# Altium PCB Motherboard.PcbDoc
Units mm, origin at the board's own origin, x right, y up, seen from the top; angles counter-clockwise.
Board outline 55 x 75 mm, 4 copper layers (Top Layer, GND, 3V, Bottom Layer), stack 0.603 mm thick; 94 components, 92 nets, 318 pads, 0 vias.
Unrouted connection lines stored in the file: 177.
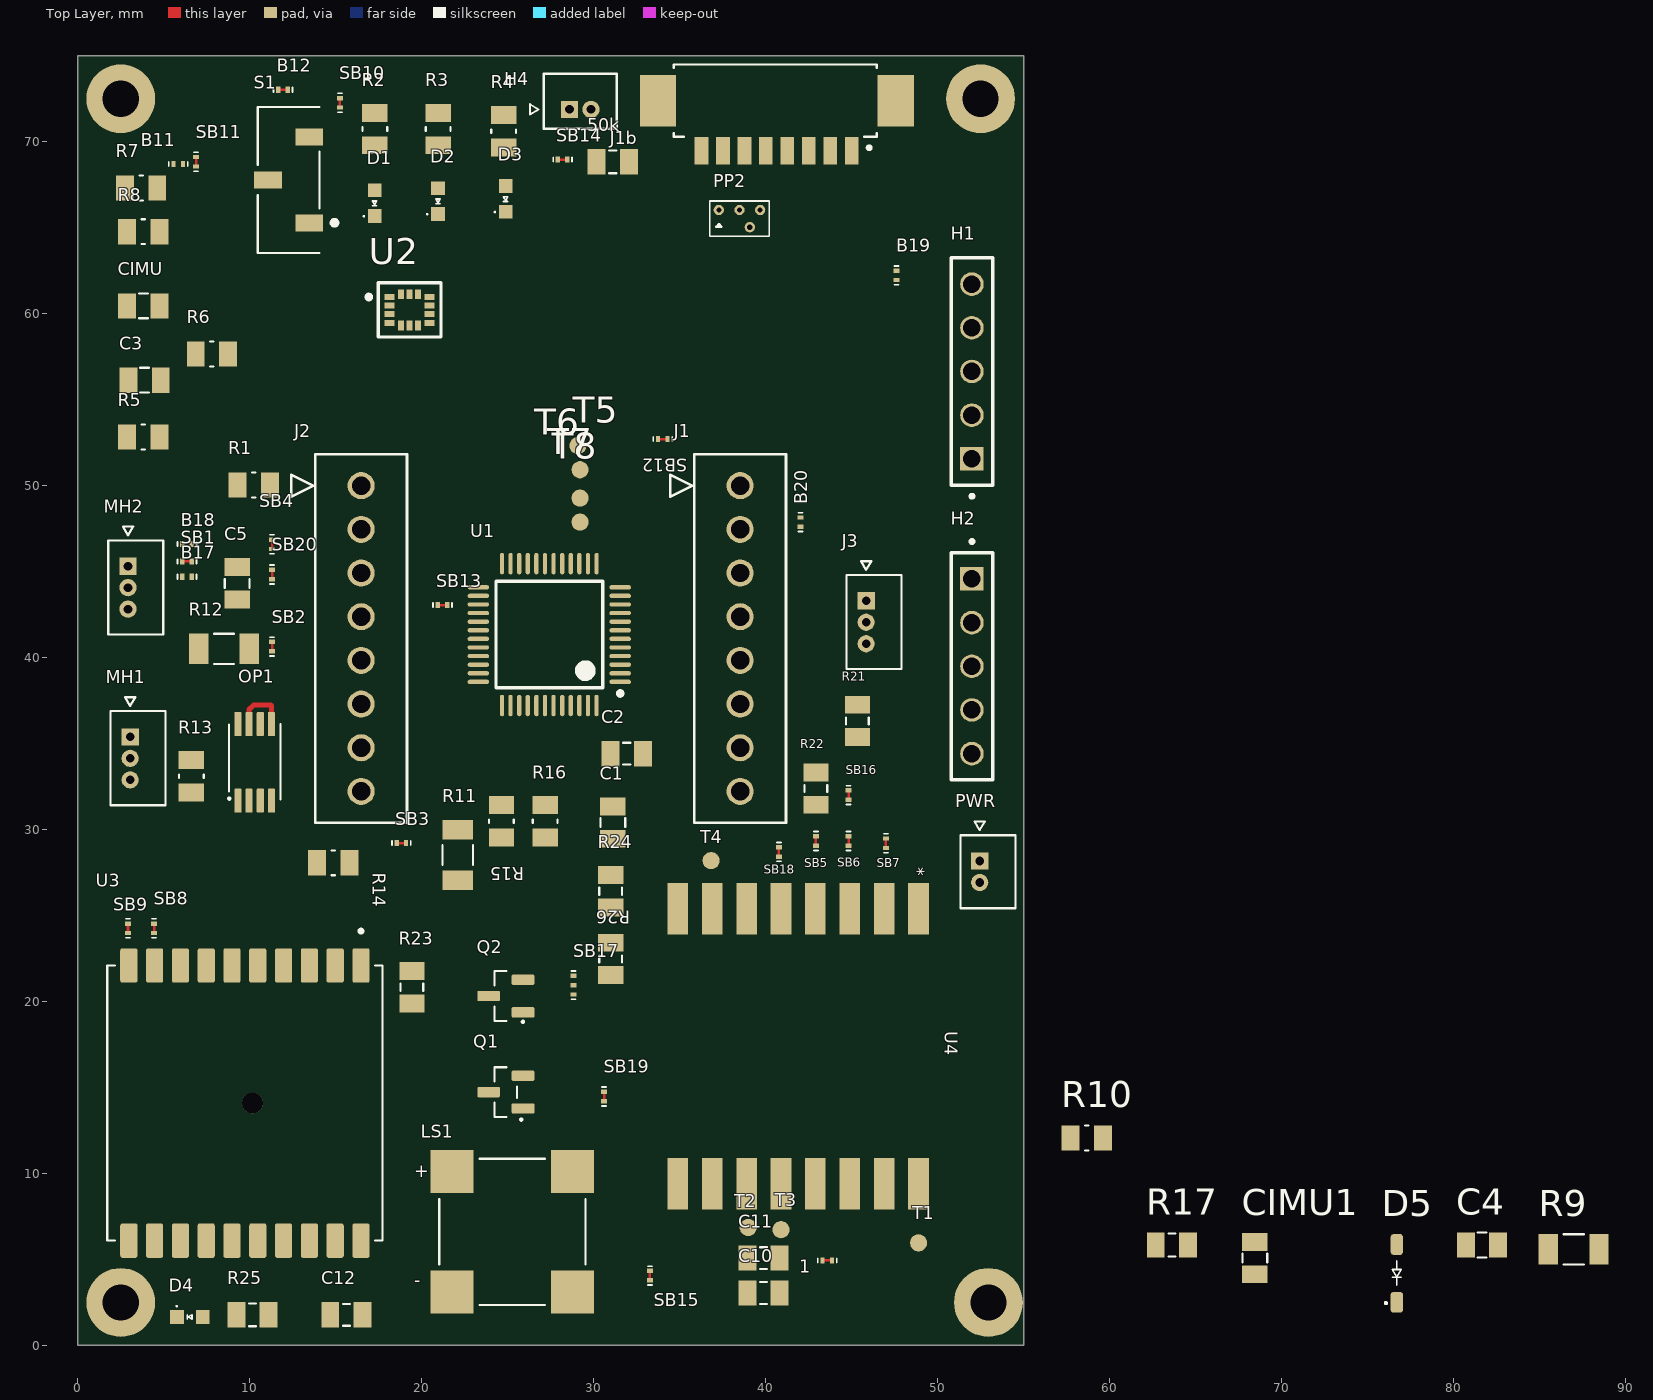
[diagram p0: Top Layer view]
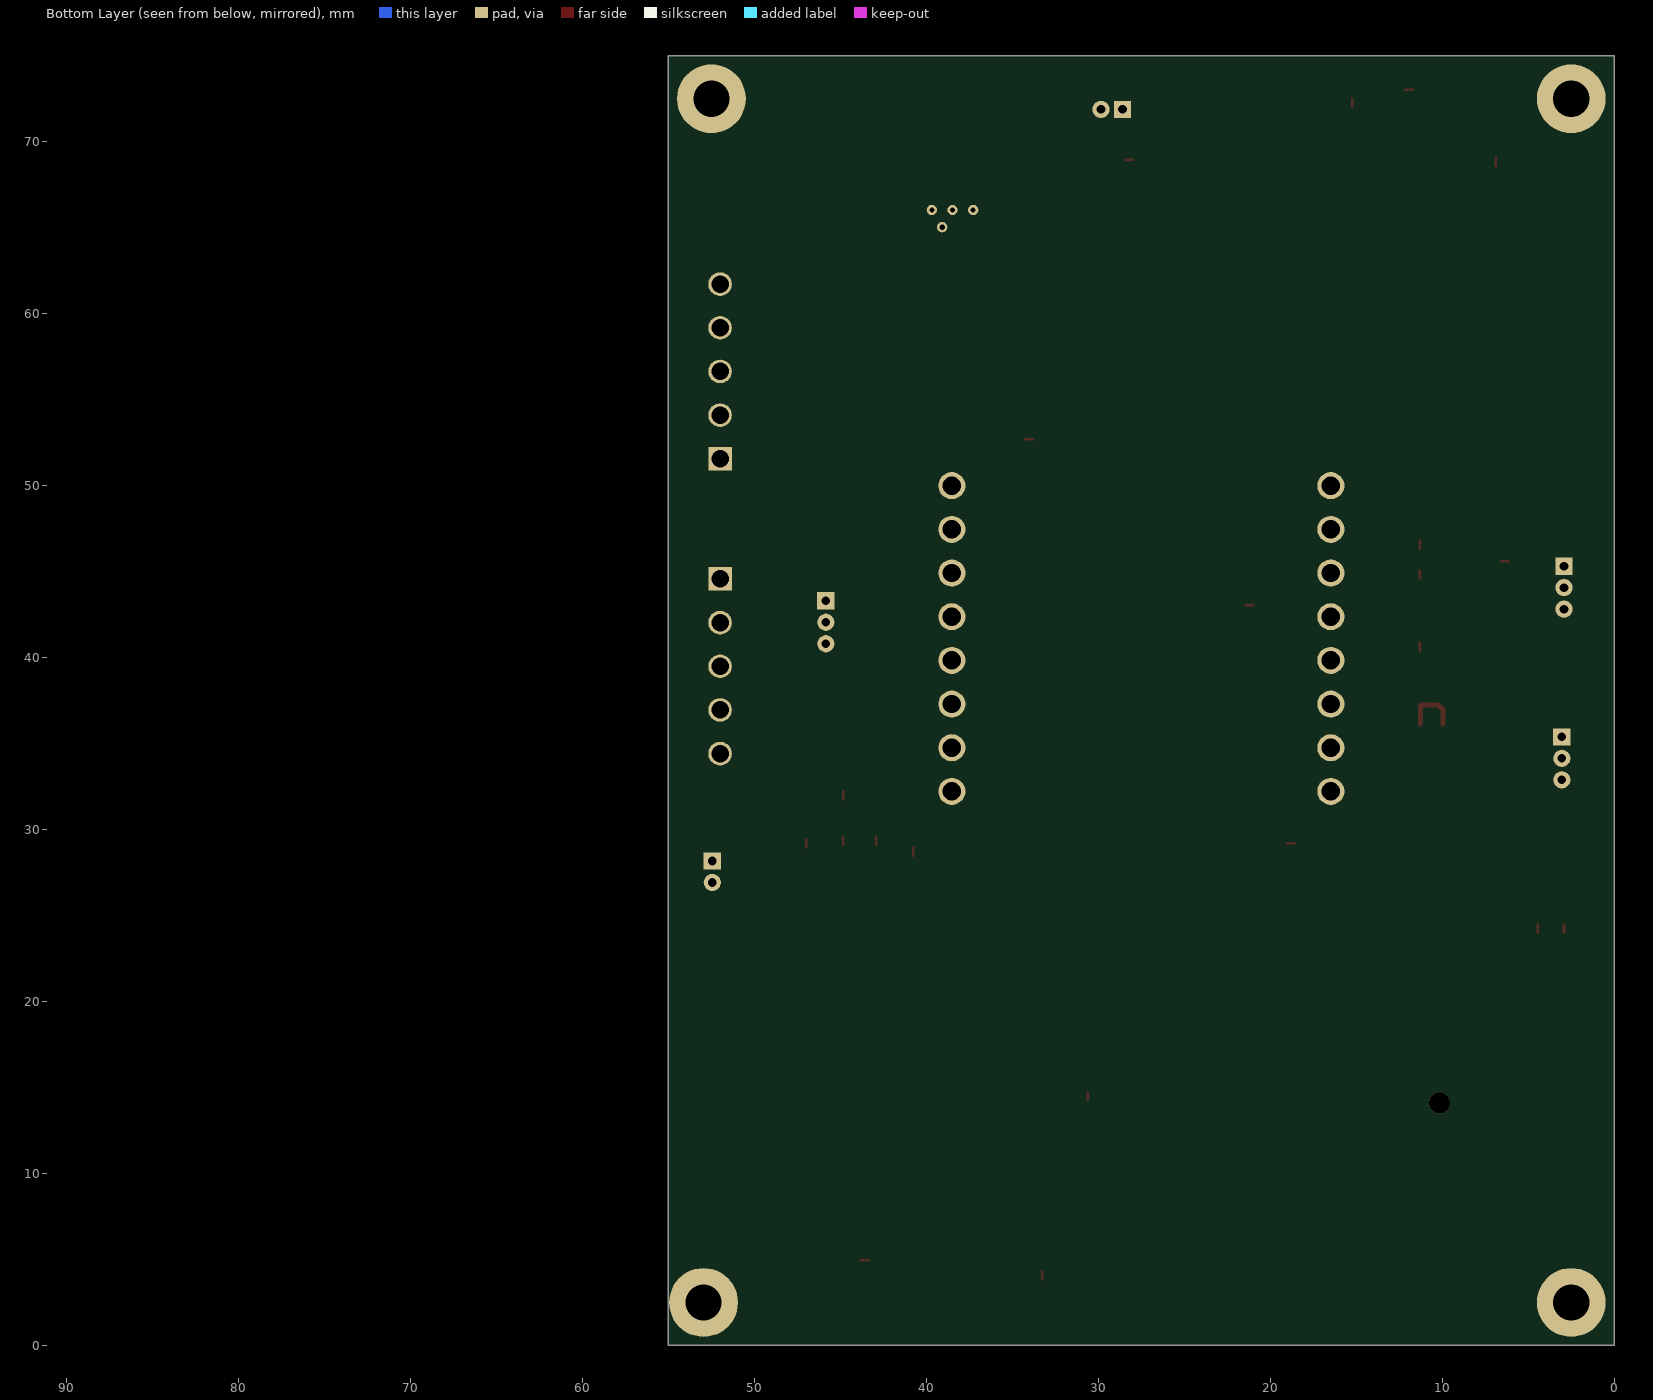
[diagram p1: Bottom Layer view, seen from below]
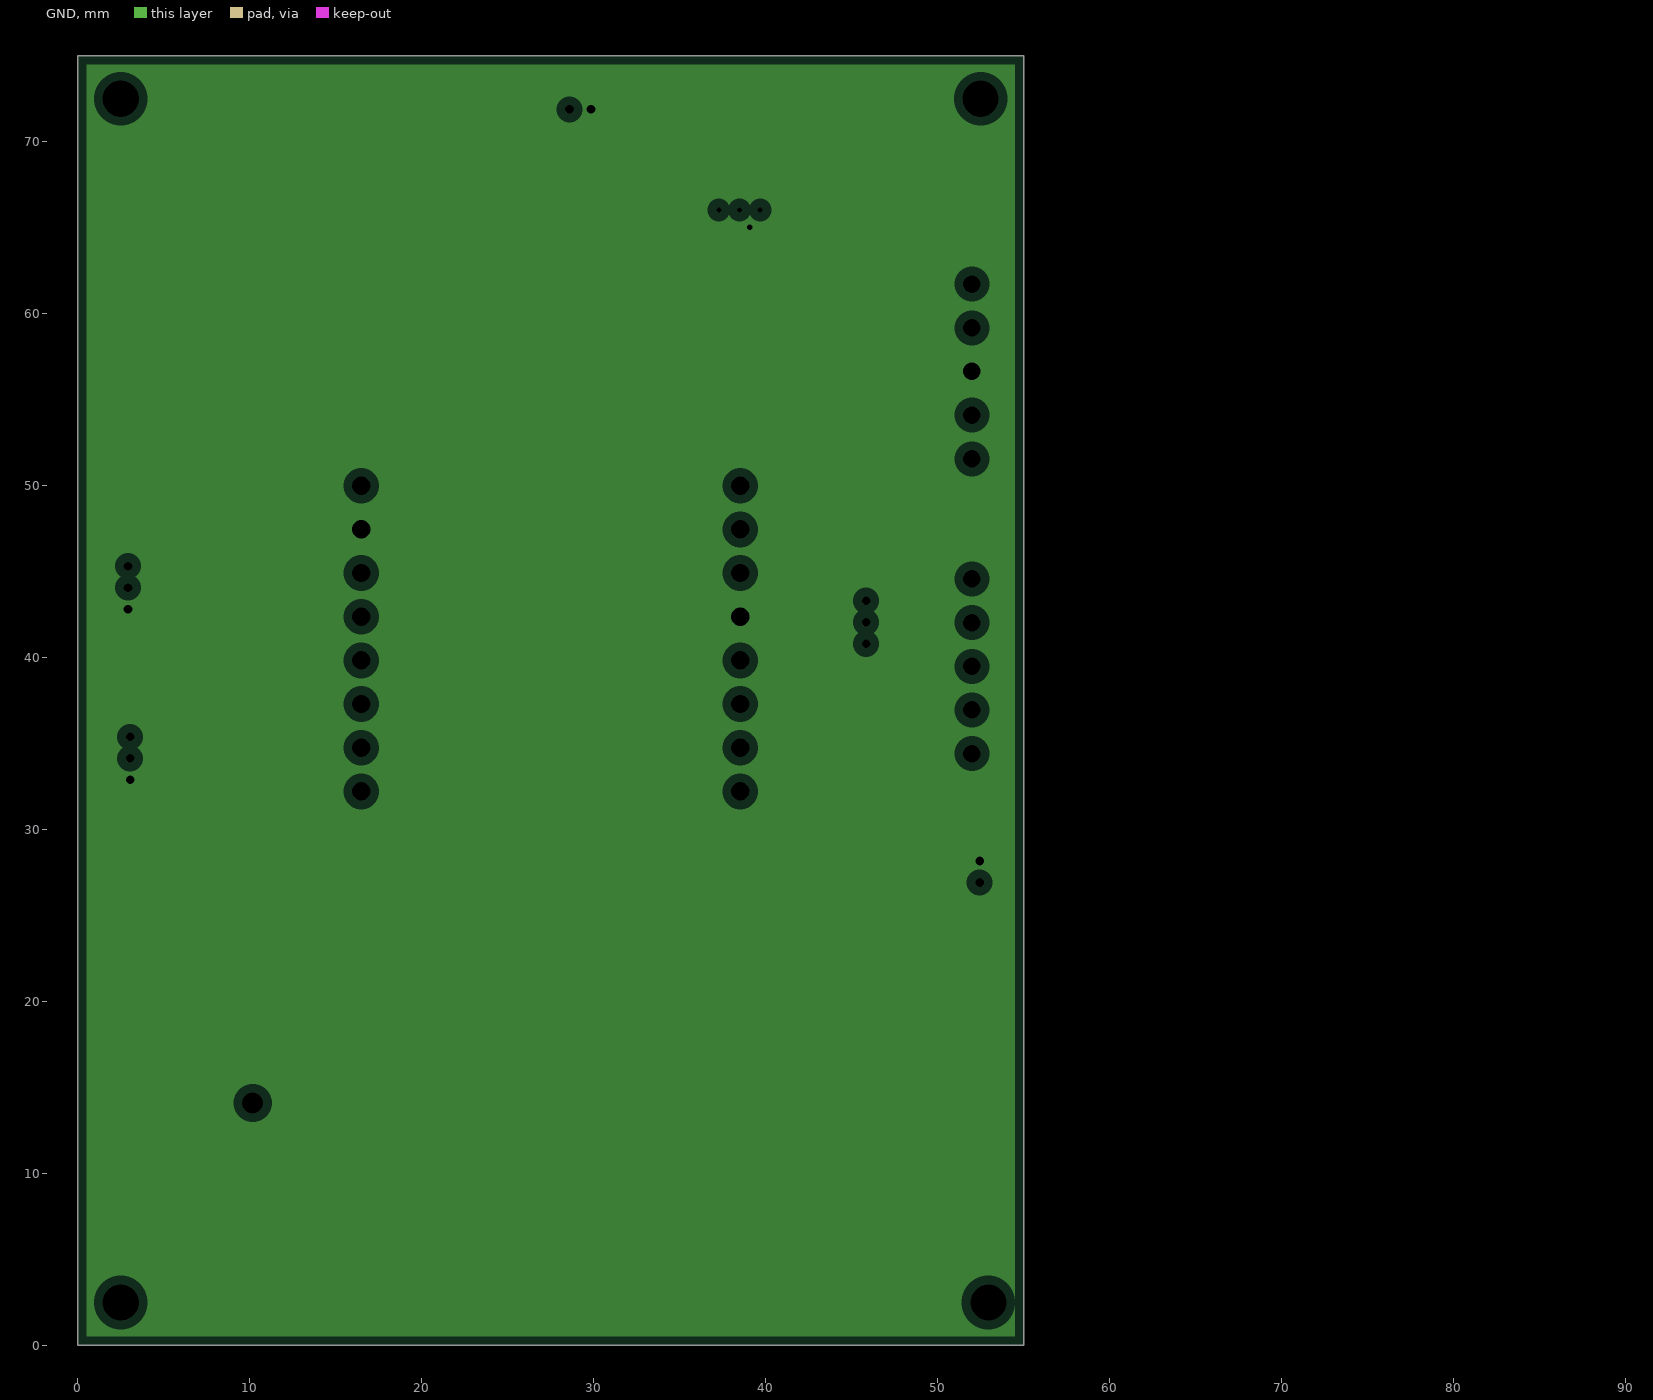
[diagram p2: GND, clearances drawn from the general rule]
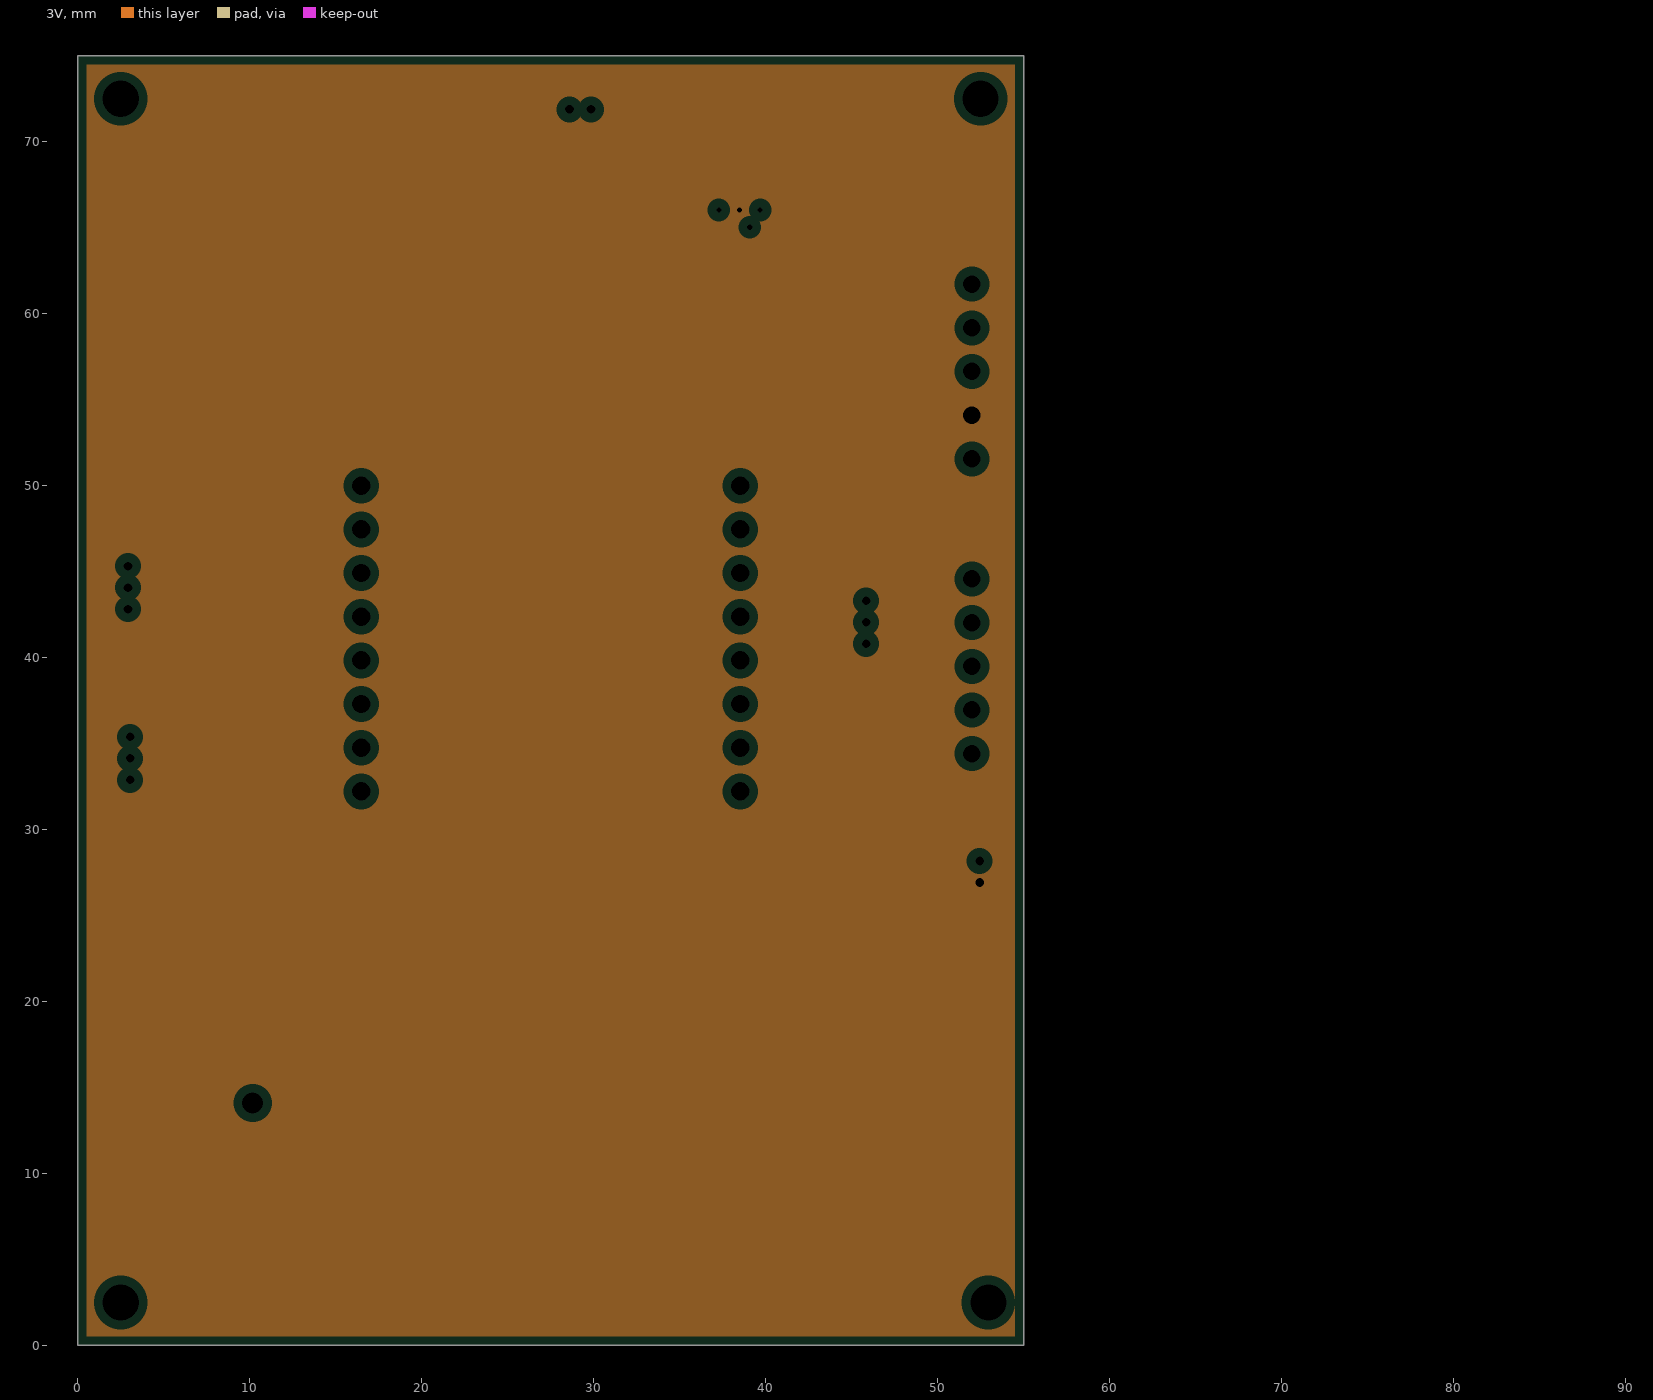
[diagram p3: 3V, clearances drawn from the general rule]

## Layer stack, top to bottom
Top Solder: solder mask 0.0102, Solder Resist, Dk 3.5
Top Layer: signal copper 0.0356
Dielectric 2: prepreg 0.0711, PP-006, Dk 4.1
GND: plane copper 0.035, net GND
Dielectric 1: dielectric 0.32, FR-4, Dk 4.8
3V: plane copper 0.035, net 3V3
Dielectric 3: prepreg 0.0711, PP-006, Dk 4.1
Bottom Layer: signal copper 0.0356
Bottom Solder: solder mask 0.0102, Solder Resist, Dk 3.5

## Board outline
0,0 55,0 55,75 0,75

## Design rules (kind name [scope] priority, off if disabled: settings)
Clearance [All] p1: gap=0.152 ignorepadtopadclearanceinfootprint=FALSE except(0: Arc-Hole Track-Hole SMDPad-Hole THPad-Hole Via-Hole Fill-Hole Poly-Hole Region-Hole Text-Hole)
HoleSize [All] p1: absolutevalues=TRUE maxlimit=6.2 minlimit=0.3 maxpercent=80.000 minpercent=20.000
MinimumAnnularRing [All] p1: minimumring=0.15
MinimumSolderMaskSliver [All] p1: minsoldermaskwidth=0.1
PlaneClearance [All] p1: clearance=0.508
PlaneConnect [All] p1: planeconnectstyle=Relief reliefexpansion=0.508 reliefentries=4 reliefconductorwidth=0.254 reliefairgap=0.254
PolygonConnect ViaConnect [IsVia] p1: connectstyle=Direct reliefconductorwidth=0.254 reliefentries=4 polygonreliefangle="90 Angle" airgapwidth=0.254
PolygonConnect [All] p2: connectstyle=Relief reliefconductorwidth=0.254 reliefentries=4 polygonreliefangle="90 Angle" airgapwidth=0.254
RoutingVias [All] p1: holewidth=0.3 width=0.6 viastyle="Through Hole" minholewidth=0.3 minwidth=0.5 maxholewidth=1 maxwidth=5
SilkToSilkClearance [All] p1: silktosilkclearance=0.1
SilkToSolderMaskClearance [IsPad] p1: minsilkscreentomaskgap=0.1 clearancetoexposedcopper=TRUE
SolderMaskExpansion [All] p1: expansion=0.051 istentingtop=FALSE
SupplyNets "Schematic Supply Nets_5" [InNet('3V3')] p1: voltage=0.000
SupplyNets "Schematic Supply Nets_4" [InNet('Vbat')] p2: voltage=0.000
SupplyNets "Schematic Supply Nets_3" [InNet('5V')] p3: voltage=0.000
SupplyNets "Schematic Supply Nets_2" [InNet('GND')] p4: voltage=0.000
SupplyNets "Schematic Supply Nets_1" [InNet('1V8')] p5: voltage=0.000
SupplyNets "Schematic Supply Nets" [InNet('GPS_3V3')] p6: voltage=0.000
Width [All] p1: maxlimit=25.4 minlimit=0.15 preferedwidth=0.3
24 further rules are at their usual default settings.

## Components (designator, comment, footprint, x,y, rotation, side; value= is the part's Value field where it differs from the comment)
1 "Solder Jumper Normally Closed 0201" "Solder Bridge Closed 0201"#1 43.582,4.953 r0 top net-tie
50k "=Value" Resistor_0805_2012M-50N 31.115,68.834 r0 top
B11 "Solder Jumper Normally Closed 0201" "Solder Bridge Closed 0201"#2 5.842,68.707 r180 top net-tie
B12 "Solder Jumper Normally Closed 0201" "Solder Bridge Closed 0201"#1 11.938,73.025 r0 top net-tie
B17 "Solder Jumper Normally Open 0201" "Solder Bridge Open 0201" 6.35,44.704 r0 top
B18 "Solder Jumper Normally Open 0201" "Solder Bridge Open 0201" 6.35,46.609 r0 top
B19 "Solder Jumper Normally Open 0201" "Solder Bridge Open 0201" 47.625,62.23 r90 top
B20 "Solder Jumper Normally Open 0201" "Solder Bridge Open 0201" 42.037,47.879 r270 top
C1 "100nF" CAPACITOR_0805_2012M-70N 31.115,30.404 r270 top
C2 "22uF" CAPACITOR_0805_2012M-70N 31.928,34.417 r0 top
C3 "100nF" CAPACITOR_0805_2012M-70N 3.886,56.134 r180 top
C4 "100nF" CAPACITOR_0805_2012M-70N 81.661,5.842 r0 top
C5 "1nF" CAPACITOR_0805_2012M-70N 9.271,44.323 r270 top
C10 "220nF" CAPACITOR_0805_2012M-70N 39.878,3.048 r180 top
C11 "22uF" CAPACITOR_0805_2012M-70N 39.878,5.08 r180 top
C12 "22uF" CAPACITOR_0805_2012M-70N 15.621,1.778 r0 top
CIMU "100nF" CAPACITOR_0805_2012M-70N 3.81,60.452 r180 top
CIMU1 "100nF" CAPACITOR_0805_2012M-70N 68.453,5.08 r90 top
D1 "LTST-C190 Series" LED_0603_1608M_0.80mm 17.272,66.433 r90 top
D2 "LTST-C190 Series" LED_0603_1608M_0.80mm 20.955,66.548 r90 top
D3 "LTST-C190 Series" LED_0603_1608M_0.80mm 24.892,66.675 r90 top
D4 "LTST-C190 Series" LED_0603_1608M_0.80mm 6.515,1.651 r0 top
D5 "1N4148W-TP" SOD123-1.35mm-N 76.708,4.191 r90 top
H1 "SSQ-105-03-S-S" SAMTEC_SSQ-105-03-S-S 52,56.642 r90 top
H2 "" SAMTEC_SSQ-105-03-S-S 52,39.497 r270 top
H4 "0530470210" MOLEX_0530470210 29.22,71.882 r180 top
J1 "PPTC081LFBN-RC" CONN_PPTC081LFBN-RC_SUL 38.52,50 r90 top
J1b "0532610871" MOLEX_0532610871 40.64,72.39 r180 top
J2 "" CONN_PPTC081LFBN-RC_SUL 16.48,50 r90 top
J3 "0530470310" MOLEX_0530470310 45.847,42.057 r90 top
LS1 "CMT-8504-100-SMT-TR" XDCR_CMT-8504-100-SMT-TR 25.273,6.604 r0 top
MH1 "0530470310" MOLEX_0530470310 3.048,34.143 r90 top
MH2 "0530470310" MOLEX_0530470310 2.921,44.069 r90 top
OP1 "NCS2333DMR2G" MSOP-8N-3mmBody-1.1mm 10.287,33.909 r90 top
PP2 "Headerless Pogo Holes 4-pin" POGO_4_PIN_HEADER 38.481,65.532 r0 top
PWR "0530470210" MOLEX_0530470210 52.451,27.549 r90 top
Q1 "AS2312" SOT23-3N-1.15mm 24.892,14.732 r180 top
Q2 "SSM3J328R,LF" SOT23F-3-0.8mm 24.892,20.32 r180 top
R1 "47k" Resistor_0805_2012M-50N 10.236,50.038 r0 top
R2 "1k" Resistor_0805_2012M-50N 17.272,70.739 r270 top
R3 "1k" Resistor_0805_2012M-50N 20.955,70.739 r270 top
R4 "1k" Resistor_0805_2012M-50N 24.765,70.612 r270 top
R5 "47k" Resistor_0805_2012M-50N 3.81,52.832 r0 top
R6 "47k" Resistor_0805_2012M-50N 7.798,57.658 r180 top
R7 "4.7k" Resistor_0805_2012M-50N 3.683,67.31 r180 top
R8 "10k" Resistor_0805_2012M-50N 3.81,64.77 r0 top
R9 "2" RESISTOR_1206_3216M_55N 86.995,5.588 r0 top
R10 "10k" Resistor_0805_2012M-50N 58.674,12.065 r0 top
R11 "2" RESISTOR_1206_3216M_55N 22.098,28.521 r270 top
R12 "50m" RESISTOR_1206_3216M_55N 8.509,40.513 r180 top
R13 "1k" Resistor_0805_2012M-50N 6.604,33.096 r90 top
R14 "130" Resistor_0805_2012M-50N 14.859,28.067 r180 top
R15 "150" Resistor_0805_2012M-50N 24.638,30.48 r270 top
R16 "1k" Resistor_0805_2012M-50N 27.178,30.48 r270 top
R17 "600" Resistor_0805_2012M-50N 63.627,5.842 r0 top
R21 "180k" Resistor_0805_2012M-50N 45.339,36.322 r90 top
R22 "180k" Resistor_0805_2012M-50N 42.926,32.385 r90 top
R23 "180k" Resistor_0805_2012M-50N 19.431,20.828 r270 top
R24 "1k" Resistor_0805_2012M-50N 30.988,26.416 r90 top
R25 "1k" Resistor_0805_2012M-50N 10.16,1.778 r0 top
R26 "39k" Resistor_0805_2012M-50N 30.988,22.479 r90 top
S1 "JS102011JCQN" SW_JS102011JCQN 12.262,67.778 r90 top
SB1 "Solder Jumper Normally Closed 0201" "Solder Bridge Closed 0201"#1 6.35,45.593 r180 top net-tie
SB2 "Solder Jumper Normally Closed 0201" "Solder Bridge Closed 0201"#1 11.303,40.64 r90 top net-tie
SB3 "Solder Jumper Normally Closed 0201" "Solder Bridge Closed 0201"#1 18.817,29.21 r0 top net-tie
SB4 "Solder Jumper Normally Closed 0201" "Solder Bridge Closed 0201"#1 11.303,46.588 r90 top net-tie
SB5 "Solder Jumper Normally Closed 0201" "Solder Bridge Closed 0201"#1 42.926,29.337 r270 top net-tie
SB6 "Solder Jumper Normally Closed 0201" "Solder Bridge Closed 0201"#1 44.831,29.337 r270 top net-tie
SB7 "Solder Jumper Normally Closed 0201" "Solder Bridge Closed 0201"#1 46.99,29.21 r270 top net-tie
SB8 "Solder Jumper Normally Closed 0201" "Solder Bridge Closed 0201"#1 4.445,24.257 r270 top net-tie
SB9 "Solder Jumper Normally Closed 0201" "Solder Bridge Closed 0201"#1 2.921,24.257 r270 top net-tie
SB10 "Solder Jumper Normally Closed 0201" "Solder Bridge Closed 0201"#1 15.24,72.263 r90 top net-tie
SB11 "Solder Jumper Normally Closed 0201" "Solder Bridge Closed 0201"#1 6.879,68.834 r90 top net-tie
SB12 "Solder Jumper Normally Closed 0201" "Solder Bridge Closed 0201"#1 34.015,52.705 r180 top net-tie
SB13 "Solder Jumper Normally Closed 0201" "Solder Bridge Closed 0201"#1 21.209,43.053 r0 top net-tie
SB14 "Solder Jumper Normally Closed 0201" "Solder Bridge Closed 0201"#1 28.194,68.961 r0 top net-tie
SB15 "Solder Jumper Normally Closed 0201" "Solder Bridge Closed 0201"#1 33.274,4.064 r90 top net-tie
SB16 "Solder Jumper Normally Closed 0201" "Solder Bridge Closed 0201"#1 44.831,32.004 r90 top net-tie
SB17 "Solder Jumper 3-pin Normally Open 0201" "Solder Bridge 3-pin Open 0201" 28.829,20.955 r270 top
SB18 "Solder Jumper Normally Closed 0201" "Solder Bridge Closed 0201"#1 40.767,28.702 r270 top net-tie
SB19 "Solder Jumper Normally Closed 0201" "Solder Bridge Closed 0201"#1 30.607,14.478 r270 top net-tie
SB20 "Solder Jumper Normally Closed 0201" "Solder Bridge Closed 0201"#1 11.303,44.831 r270 top net-tie
T1 "Test Pad" "Test Pad" 48.895,5.969 r180 top
T2 "Test Pad" "Test Pad" 38.989,6.858 r180 top
T3 "Test Pad" "Test Pad" 40.894,6.731 r180 top
T4 "Test Pad" "Test Pad" 36.83,28.194 r180 top
T5 "Test Pad" "Test Pad" 29.083,52.324 r0 top
T6 "Test Pad" "Test Pad" 29.21,50.927 r0 top
T7 "Test Pad" "Test Pad" 29.21,49.276 r0 top
T8 "Test Pad" "Test Pad" 29.21,47.879 r0 top
U1 "MSP430FR2355TPT" PT0048A_L 27.42,41.341 r180 top
U2 "LSM6DSMTR" FP-LGA-14L-DM00249496-MFG 19.296,60.222 r0 top
U3 "CD-PA1616D" XCVR_CD-PA1616D 9.719,14.096 r270 top
U4 "LORA127X-C1" LoRa127X-C1 33.894,25.398 r270 top

## Footprints (in the part's own frame and the unit in brackets; to place one, negate y for a bottom-side part, rotate by r counter-clockwise, add the part's x,y. Pads: shape width x height; smd on the part's side, far side on the other; paste and mask are expansions set on the pad)
CAPACITOR_0805_2012M-70N [mm] "Capacitor, 0805 (2012 metric), 0.7mm high, nominal pads,"
  rect 1.04x1.47 smd mask+0.051: 1(-0.94,0) 2(0.94,0)
  silkscreen extent -0.25,-0.72 0.25,0.72, body extent -1,-0.73 1,0.73, height 1.23
CONN_PPTC081LFBN-RC_SUL [mil]
  round 62 / inner round 60 / far side round 62 hole 42 paste-99999 mask+0: 1(0,0) 2(-100,0) 3(-200,0) 4(-300,0) 5(-400,0) 6(-500,0) 7(-600,0) 8(-700,0)
  silkscreen extent -772,-105 72,160
FP-LGA-14L-DM00249496-MFG [mm]
  rect 0.575x0.35 smd paste+0 mask+0: 1(-1.162,0.75) 2(-1.162,0.25) 3(-1.162,-0.25) 4(-1.162,-0.75) 8(1.162,-0.75) 9(1.162,-0.25) 10(1.162,0.25) 11(1.162,0.75)
  rect 0.35x0.575 smd paste+0 mask+0: 5(-0.5,-0.913) 6(0,-0.913) 7(0.5,-0.913) 12(0.5,0.912) 13(0,0.912) 14(-0.5,0.912)
  silkscreen extent -2.5,-1.57 1.83,1.58, body extent -2.05,-1.8 2.05,1.8, height 0.25
LED_0603_1608M_0.80mm [mm] "LED, 0603 (1608 metric), 0.8mm high"
  rect 0.8x0.8 smd mask+0.051: A(0.75,0) C(-0.75,0)
  silkscreen extent -0.79,-0.12 0.13,0.66, body extent -0.8,-0.4 0.8,0.4, height 0.8
LoRa127X-C1 [mm]
  rect 3x1.2 smd paste-10 mask+0: 1(0,15) 2(0,13) 3(0,11) 4(0,9) 5(0,7) 6(0,5) 7(0,3) 8(0,1) 9(16,1) 10(16,3) 11(16,5) 12(16,7) 13(16,9) 14(16,11) 15(16,13) 16(16,15)
  body extent 0,0 16,16, height 2.1
MOLEX_0530470210 [mm]
  rect 1x1 hole 0.5 mask+0.051: 1(0.625,0)
  round 1 hole 0.5 mask+0.051: 2(-0.625,0)
  silkscreen extent -2.13,-2.07 2.93,1.13, body extent -2.12,-2.06 2.13,1.14, height 4.21
MOLEX_0530470310 [mm] "Header - Picoblade 03-pin, TH, STR, 4.2mm height"
  rect 1x1 hole 0.5 mask+0.051: 1(1.25,0)
  round 1 hole 0.5 mask+0.051: 2(0,0) 3(-1.25,0)
  silkscreen extent -2.73,-2.05 3.55,1.15, body extent -2.75,-2.06 2.75,1.14, height 4.21
MOLEX_0532610871 [mm] "Header - Picoblade 08-pin, SMT, RA, 3.4mm height"
  rect 0.8x1.6 smd mask+0.051: 1(-4.375,2.9) 2(-3.125,2.9) 3(-1.875,2.9) 4(-0.625,2.9) 5(0.625,2.9) 6(1.875,2.9) 7(3.125,2.9) 8(4.375,2.9)
  rect 2.1x3 smd mask+0.051: MP1(-6.925,0) MP2(6.905,0)
  silkscreen extent -5.83,-2.1 5.99,2.83, body extent -7.57,-2.1 7.58,3.1, height 3.42
MSOP-8N-3mmBody-1.1mm [mm] "MSOP, 8 pin, 0.65mm pitch, 3mm wide, nominal pads, 1.1mm high"
  rrect25% 1.4x0.41 smd mask+0.051: 1(-2.225,0.975) 2(-2.225,0.325) 3(-2.225,-0.325) 4(-2.225,-0.975) 5(2.225,-0.975) 6(2.225,-0.325) 7(2.225,0.325) 8(2.225,0.975)
  silkscreen extent -2.16,-1.5 2.24,1.5, body extent -2.45,-1.5 2.45,1.5, height 1.1
POGO_4_PIN_HEADER [mm] "4-pin header for pogo pins"
  round 0.6 hole 0.3 mask+0.051: 1(-1.2,0.5) 2(0,0.5) 3(0.6,-0.5) 4(1.2,0.5)
  silkscreen extent -1.73,-1.02 1.73,1.03
PT0048A_L [mm]
  oval 1.25x0.25 smd paste+0 mask+0.051: 1(-4.125,2.75) 2(-4.125,2.25) 3(-4.125,1.75) 4(-4.125,1.25) 5(-4.125,0.75) 6(-4.125,0.25) 7(-4.125,-0.25) 8(-4.125,-0.75) 9(-4.125,-1.25) 10(-4.125,-1.75) 11(-4.125,-2.25) 12(-4.125,-2.75) 25(4.125,-2.75) 26(4.125,-2.25) 27(4.125,-1.75) 28(4.125,-1.25) 29(4.125,-0.75) 30(4.125,-0.25) 31(4.125,0.25) 32(4.125,0.75) 33(4.125,1.25) 34(4.125,1.75) 35(4.125,2.25) 36(4.125,2.75)
  oval 0.25x1.25 smd paste+0 mask+0.051: 13(-2.75,-4.125) 14(-2.25,-4.125) 15(-1.75,-4.125) 16(-1.25,-4.125) 17(-0.75,-4.125) 18(-0.25,-4.125) 19(0.25,-4.125) 20(0.75,-4.125) 21(1.25,-4.125) 22(1.75,-4.125) 23(2.25,-4.125) 24(2.75,-4.125) 37(2.75,4.125) 38(2.25,4.125) 39(1.75,4.125) 40(1.25,4.125) 41(0.75,4.125) 42(0.25,4.125) 43(-0.25,4.125) 44(-0.75,4.125) 45(-1.25,4.125) 46(-1.75,4.125) 47(-2.25,4.125) 48(-2.75,4.125)
  silkscreen extent -4.25,-3.1 3.1,3.55, body extent -4.5,-4.5 4.5,4.5, height 1.6
Resistor_0805_2012M-50N [mm] "Resistor, 0805 (2012 metric), nominal pads"
  rect 1.04x1.47 smd mask+0.051: 1(-0.94,0) 2(0.94,0)
  silkscreen extent -0.2,-0.66 0.2,0.66, body extent -1,-0.63 1,0.62, height 0.5
RESISTOR_1206_3216M_55N [mm]
  rect 1.13x1.77 smd mask+0.051: 1(-1.47,0) 2(1.47,0)
  silkscreen extent -0.58,-0.88 0.58,0.88, body extent -1.6,-0.8 1.6,0.8, height 0.65
SAMTEC_SSQ-105-03-S-S [mm]
  rect 1.37x1.37 / inner round 1.37 / far side rect 1.37x1.37 hole 1.02: 1(-5.08,0)
  round 1.37 hole 1.02: 2(-2.54,0) 3(0,0) 4(2.54,0) 5(5.08,0)
  silkscreen extent -7.35,-1.2 6.61,1.2, body extent -6.6,-1.21 6.6,1.21, height 8.51
SOD123-1.35mm-N [mm] "SOD-123, 1.35mm high, nominal pads"
  rrect50% 1.21x0.73 smd mask+0.051: A(1.68,0) C(-1.68,0)
  silkscreen extent -1.75,-0.25 0.74,0.66, body extent -1.83,-0.78 1.82,0.77, height 1.5
"Solder Bridge 3-pin Open 0201" [mm]
  rect 0.25x0.35 smd paste-100 mask+0: 1(0,0) 2(-0.55,0) 3(0.55,0)
  silkscreen extent -0.82,-0.12 0.83,0.13
"Solder Bridge Closed 0201"#1 [mm]
  rect 0.25x0.35 smd paste-100 mask+0: 1(-0.275,0) 2(0.275,0)
  Top Layer lines w0.15: -0.225,0 0.225,0
  silkscreen extent -0.55,-0.13 0.55,0.13
"Solder Bridge Closed 0201"#2 [mm]
  rect 0.25x0.35 smd paste-100 mask+0: 1(-0.275,0) 2(0.275,0)
  silkscreen extent -0.55,-0.13 0.55,0.12
"Solder Bridge Open 0201" [mm]
  rect 0.25x0.35 smd paste-100 mask+0: 1(-0.275,0) 2(0.275,0)
  silkscreen extent -0.55,-0.13 0.55,0.13
SOT23-3N-1.15mm [mm] "SOT23, 3-pin, 1.15mm high, nominal pads"
  rrect25% 1.32x0.6 smd mask+0.051: 1(-1,0.95) 2(-1,-0.95) 3(1,0)
  silkscreen extent -0.93,-1.45 0.65,1.63, body extent -1.19,-1.45 1.21,1.45, height 0.91
SOT23F-3-0.8mm [mm] "SOT23, 3-pin, flat leads, 0.8mm high"
  rrect25% 1.32x0.6 smd mask+0.051: 1(-1,0.95) 2(-1,-0.95) 3(1,0)
  silkscreen extent -1.02,-1.45 0.65,1.52, body extent -1.2,-1.4 1.2,1.4, height 0.88
SW_JS102011JCQN [mm]
  rect 1x1.6 smd: 1(-2.5,-1.2) 2(0,1.2) 3(2.5,-1.2)
  silkscreen extent -4.25,-2.81 4.25,1.8, body extent -4.25,-2 4.25,2, height 5.35
"Test Pad" [mm] "Exposed copper pad"
  round 1 smd: 1(0,0)
XCVR_CD-PA1616D [mm]
  rrect25% 2x1 smd: 1(-8,6.75) 2(-8,5.25) 3(-8,3.75) 4(-8,2.25) 5(-8,0.75) 6(-8,-0.75) 7(-8,-2.25) 8(-8,-3.75) 9(-8,-5.25) 10(-8,-6.75) 11(8,-6.75) 12(8,-5.25) 13(8,-3.75) 14(8,-2.25) 15(8,-0.75) 16(8,0.75) 17(8,2.25) 18(8,3.75) 19(8,5.25) 20(8,6.75)
  round 1.21 hole 1.21 unplated: ""(0,0.45)
  silkscreen extent -10.1,-8 8,8, body extent -8,-8 8,8, height 6.7
XDCR_CMT-8504-100-SMT-TR [mm]
  rect 2.5x2.5 smd: 1(3.5,3.5) 2(3.5,-3.5) N(-3.5,-3.5) P(-3.5,3.5)
  silkscreen extent -4.25,-4.25 4.25,4.25, body extent -4.25,-4.25 4.28,4.28, height 4

## Part data
50k: library part "RG2012P-xxx-D-T5 Series", "Passive - Resistor Series, 0805, 0.5%, 10 - 1M, E24, 0.063W, 1/8W, ±25ppm/°C, -55°C ~ 155°C, 0805 (2012 Metric)", Package=0805, Power=1/8W, Rated Voltage=150V, Temp Range="-55°C ~ 155°C", Temperature Coefficient=±25ppm/°C, Tolerance=0.5%, Value Range="10 ~ 1M", APSS Standard Part="APSS Standard", E Series=E24, Supplier 1=Digikey
C1 C3 C4 CIMU CIMU1: library part "Generic Capacitor", "Generic Capacitor", Capacitance at Rated Voltage=40%, MF Part No.=C0805C104K5RAC7800, Package=0805, Rated Voltage=50V, Supplier 1 Part No.=399-C0805C104K5RAC7800CT-ND, Temp Range="-55°C ~ 125°C", Temperature Coefficient=X7R, Tolerance=±10%, Supplier 1=Digikey
C2 C11 C12: library part C0805C226M9PACTU, "Passive - Capacitor, X5R, 22uF Max, 6.3V, 0805 (2012 Metric), ±20%, -55°C ~ 85°C. 8.8uF @ 5V", Capacitance at Rated Voltage=30%, Package=0402, Rated Voltage=6.3V, Supplier 1 Part No.=399-C0805C226M9PAC7800CT-ND, Temp Range="-55°C ~ 85°C", Temperature Coefficient=X5R, Tolerance=±20%, APSS Standard Part="APSS Standard", MF Part No.=C0805C226M9PACTU, Supplier 1=Digikey
C5: library part "Generic Capacitor", "Generic Capacitor", Capacitance at Rated Voltage=100%, MF Part No.=399-C0805C102J5GAC7800CT-ND, Package=0805, Rated Voltage=50V, Temp Range="-55°C ~ 125°C", Temperature Coefficient=X7R, Tolerance=±5%, Supplier 1=Digikey, Supplier 1 Part No.=399-C0805C102J5GAC7800CT-ND
C10: library part C0805C224K1RAC7800, "Passive - Capacitor, X7R, 220nF Max, 100V, 0805 (2012 Metric), ±10%, -55°C ~ 85°C. 200nF @ 10V, 110nF @ 50V, 55nF @ 100V", Capacitance at Rated Voltage=25%, Package=0805, Rated Voltage=100V, Supplier 1 Part No.=399-C0805C224K1RAC7800CT-ND, Temp Range="-55°C ~ 85°C", Temperature Coefficient=X7R, Tolerance=±10%, APSS Standard Part="APSS Standard", MF Part No.=C0805C224K1RAC7800, Supplier 1=Digikey
D1 D4: "Diode - LED, 0603", Colour=Green, MF Part No.=LTST-C190KGKT, Package=0603, Rated Voltage="5V Reverse", Temp Range="-30°C ~ 85°C", APSS Standard Part="APSS Standard", Supplier 1=Digikey
D2: "Diode - LED, 0603", Colour=Yellow, MF Part No.=LTST-C190KSKT, Package=0603, Rated Voltage="5V Reverse", Temp Range="-30°C ~ 85°C", APSS Standard Part="APSS Standard", Supplier 1=Digikey
D3: "Diode - LED, 0603", Colour=Red, MF Part No.=LTST-C190KAKT, Package=0603, Rated Voltage="5V Reverse", Temp Range="-30°C ~ 85°C", APSS Standard Part="APSS Standard", Supplier 1=Digikey
D5: "Diode - Low Reverse Leakage, 1.25 Vf @ 150 mA, 1 µA Reverse @ 75 V, SOD-123", Package=SOD-123, Rated Voltage="100V Reverse", Supplier 1 Part No.=1N4148WTPMSCT-ND, Temp Range="-65°C ~ 150°C", APSS Standard Part="APSS Standard", MF Part No.=1N4148W-TP, Supplier 1=Digikey
H2: library part SSQ-105-03-S-S, MP=SSQ-105-03-S-S
H4 PWR: "Header - Picoblade 02-pin, TH, STR", Supplier 1 Part No.=530470210, APSS Standard Part="APSS Standard", Mounting Type=Through-hole, Orientation=Straight, Pins=2, Pitch=1.25mm, Supplier 1=Digikey
  H4: MF Part No.=0530470210
J1: "No Description Available", Mfr_Name=Sullins, RefDes=RefDes, Type=Type
J1b: "Header - Picoblade 08-pin, SMT, RA", Supplier 1 Part No.=WM7626CT-ND, APSS Standard Part="APSS Standard", MF Part No.=0532610871, Mounting Type="Surface Mount", Orientation="Right Angle", Pins=8, Pitch=1.25mm, Supplier 1=Digikey
J2: library part PPTC081LFBN-RC, "No Description Available", Mfr_Name=Sullins, RefDes=RefDes, Type=Type
J3 MH1 MH2: "Header - Picoblade 03-pin, TH, STR", Supplier 1 Part No.=WM1732-ND, APSS Standard Part="APSS Standard", MF Part No.=0530470310, Mounting Type=Through-hole, Orientation=Straight, Pins=3, Pitch=1.25mm, Supplier 1=Digikey
LS1: "8.5 mm, 5 Vo-p, 100 dB, Surface Mount (SMT), Magnetic Audio Transducer Buzzer", MF Part No.=CMT-8504-100-SMT-TR
OP1: "IC - Opamp, Precision, 2-Channel, Zero Drift, 270kHz GBWP, RRIO, 1.8V to 5.5V, -40 to 125, 8-MSOP", Package="MSOP-8 0.65mm", Rated Voltage=5.5V, Supplier 1 Part No.=488-NCS2333DMR2GCT-ND, Temp Range="-40°C ~ 125°C", APSS Standard Part="APSS Standard", MF Part No.=NCS2333DMR2G, Supplier 1=Digikey
Q1: "Transistor - MOSFET, N-Channel AS2312", Package=SOT23-3, Power=1.2W, Rated Voltage="20 Vds", Supplier 1 Part No.=4530-AS2312CT-ND, Temp Range="0°C ~ 150°C (TJ)", APSS Standard Part="APSS Standard", MF Part No.=AS2312, Supplier 1=Digikey
Q2: "Transistor - MOSFET, P-Channel SSM3J328R,LF", Package=SOT23-3, Power=1W, Rated Voltage="20 Vds", Supplier 1 Part No.=SSM3J328RLFCT-ND, Temp Range="0°C ~ 150°C (TJ)", APSS Standard Part="APSS Standard", MF Part No.=SSM3J328R,LF, Supplier 1=Digikey
R1 R26: library part "RMCF0805JT Series", "Passive - Resistor Series, 0805, 5%, 100m - 22M, E24, 0.063W, 1/16W, ±200ppm/°C, -55°C ~ 155°C, 0805 (2012 Metric)", MF Part No.=RMCF0805JT39K0, Package=0805, Power=1/8W, Rated Voltage=150V, Temp Range="-55°C ~ 155°C", Temperature Coefficient=±200ppm/°C, Tolerance=5%, Value Range="100m ~ 22M", APSS Standard Part="APSS Standard", E Series=E24, Supplier 1=Digikey
R2 R3 R4 R13 R14 R15 R16 R17 R24 R25: library part "RMCF0805JT Series", "Passive - Resistor Series, 0805, 5%, 100m - 22M, E24, 0.063W, 1/16W, ±200ppm/°C, -55°C ~ 155°C, 0805 (2012 Metric)", MF Part No.=RMCF0805JT1K00, Package=0805, Power=1/8W, Rated Voltage=150V, Temp Range="-55°C ~ 155°C", Temperature Coefficient=±200ppm/°C, Tolerance=5%, Value Range="100m ~ 22M", APSS Standard Part="APSS Standard", E Series=E24, Supplier 1=Digikey
R5: library part "RMCF0805JT Series", "Passive - Resistor Series, 0805, 5%, 100m - 22M, E24, 0.063W, 1/16W, ±200ppm/°C, -55°C ~ 155°C, 0805 (2012 Metric)", MF Part No.=RMCF0805JT147K0, Package=0805, Power=1/8W, Rated Voltage=150V, Temp Range="-55°C ~ 155°C", Temperature Coefficient=±200ppm/°C, Tolerance=5%, Value Range="100m ~ 22M", APSS Standard Part="APSS Standard", E Series=E24, Supplier 1=Digikey
R6: library part "RMCF0805JT Series", "Passive - Resistor Series, 0805, 5%, 100m - 22M, E24, 0.063W, 1/16W, ±200ppm/°C, -55°C ~ 155°C, 0805 (2012 Metric)", MF Part No.=RMCF0805JT47K0, Package=0805, Power=1/8W, Rated Voltage=150V, Temp Range="-55°C ~ 155°C", Temperature Coefficient=±200ppm/°C, Tolerance=5%, Value Range="100m ~ 22M", APSS Standard Part="APSS Standard", E Series=E24, Supplier 1=Digikey
R7 R8 R10: library part "RMCF0805JT Series", "Passive - Resistor Series, 0805, 5%, 100m - 22M, E24, 0.063W, 1/16W, ±200ppm/°C, -55°C ~ 155°C, 0805 (2012 Metric)", MF Part No.=RMCF0805JT4K70, Package=0805, Power=1/8W, Rated Voltage=150V, Temp Range="-55°C ~ 155°C", Temperature Coefficient=±200ppm/°C, Tolerance=5%, Value Range="100m ~ 22M", APSS Standard Part="APSS Standard", E Series=E24, Supplier 1=Digikey
R9 R11 R12: library part "TNPW1206xxxxDE Series", "Passive - Resistor Series, 1206, 0.5%, 1R - 2M, E24+E96, 0.52W, 1/2W, ±25ppm/°C, -55°C ~ 155°C, 0805 (3216 Metric)", MF Part No.=TNPW1206xxxxDE, Package=0805, Power=0.52W, Rated Voltage=200V, Temp Range="-55°C ~ 155°C", Temperature Coefficient=±200ppm/°C, Tolerance=0.5%, Value Range="1R ~ 2M", APSS Standard Part="APSS Standard", E Series=E24+E96, Supplier 1=Digikey
R21 R22 R23: library part "RMCF0805JT Series", "Passive - Resistor Series, 0805, 5%, 100m - 22M, E24, 0.063W, 1/16W, ±200ppm/°C, -55°C ~ 155°C, 0805 (2012 Metric)", MF Part No.=RMCF0805JT180K, Package=0805, Power=1/8W, Rated Voltage=150V, Temp Range="-55°C ~ 155°C", Temperature Coefficient=±200ppm/°C, Tolerance=5%, Value Range="100m ~ 22M", APSS Standard Part="APSS Standard", E Series=E24, Supplier 1=Digikey
S1: "Switch - Slide, SPDT, Straight, Break Before Make, 300mA, 6V", Rated Voltage=6V, Supplier 1 Part No.=CKN10721CT-ND, Temp Range="-40°C ~ 85°C", APSS Standard Part="APSS Standard", MF Part No.=JS102011JCQN, Mounting Type=Through-hole, Orientation=Straight, Supplier 1=Digikey
U1: library part MSP430FR2355IPT, Package=LQFP-48, Rated Voltage="1.8V ~ 3.6V", Supplier 1 Part No.=296-50260-ND, Temp Range="-40°C ~ 105°C (TA)", MF Part No.=MSP430FR2355TPT, Supplier 1=Digikey
U2: library part CMP-12177-000008-1, "IMU ACCEL/GYRO I2C/SPI 14LGA", Manufacturer=STMicroelectronics, Max Supply Voltage=3.6V, Min Supply Voltage=1.62V, Operating Supply Current=0.29-0.65mA, Package=LGA-14L-DM00249496, Temperature="-40°C to +85°C", Temperature Range High=+85°C, Temperature Range Low=-40°C, Accel Range=2/4/8/16g, Automotive=No, Category=IC, ComponentLink2Description=Datasheet, ComponentLink2URL=https://www.st.com/resource/en/datasheet/lsm6dsm.pdf, Device Class L1=Sensors, Device Class L2="Motion Sensors", Device Class L3="Inertial Measurement Units (IMUs)", Digikey Description="IMU ACCEL/GYRO I2C/SPI 14LGA", Footprint Url=https://www.st.com/content/ccc/resource/technical/document/technical_note/73/17/9c/16/dd/96/4a/01/CD00134799.pdf/files/CD00134799.pdf/jcr:content/translations/en.CD00134799.pdf, Gyro Range=125/250/500/1000/2000°/s, Height=0.86mm, Lead Free=Yes, Manufacturer Part Number=LSM6DSMTR, Mouser Description="LSM6DSM Series 3.6 V I2C/SPI 3D Accelerometer and 3D Gyroscope - LGA-14", Octopart=https://octopart.com/lsm6dsmtr-stmicroelectronics-66358194, Resolution=16bits, RoHS=TRUE, Sensor Output=I2C,SPI, Sensor Type=Temperature,Accelerometer,Gyroscope
U3: "CD-PA1616D GNSS patch antenna module", MF Part No.=CD-PA1616D
U4: "LoRa transceiver", MF Part No.=LORA127X-C1
1 B11 B12 B17 B18 B19 B20 SB1 SB2 SB3 SB4 SB5 SB6 SB7 SB8 SB9 SB10 SB11 SB12 SB13 SB14 SB15 SB16 SB17 SB18 SB19 SB20: DEBUG=DEBUG
H1: MP=SSQ-105-03-S-S

## Free pads (board coordinates)
  round 4 hole 2.1: 2(2.5,2.5) 2(2.5,72.5) 2(52.5,72.5) 2(52.959,2.5)

## Nets (pads, with @x,y where several pads share a name; then routed paths per layer and width w, separated by ;. In a path a pad name is that pad's centre, name@x,y a point inside that pad or via, vN(x,y) a via of type N, cw(c..) or ccw(c..) an arc to the next point about the centre after c; other vN are vias at no path point)
1V8: H1.1
1V8_EN: H2.3 U1.45
1V8_PG: H2.1 U1.47
3V3: 1.2 50k.2 B19.2 C1.2 C2.2 CIMU1.2 CIMU.2 H1.2 J1b.3 PP2.2 PWR.2 Q2.2 R1.2 R7.2 R8.2 R21.2 R22.2 SB17.2 U1.6 U2.5 U2.8
3V3_EN: H2.4
3V3_PG: H2.2 U1.46
5V: C4.2 D5.C H1.4 LS1.P MH1.1 OP1.8 R9.1 R11.1 R12.1 S1.2 SB2.2
5V_EN: H2.5 U1.44
CurrentSenseOutput: B18.2 SB4.1 SB20.2
CurrentSensePower: B17.1 B18.1 MH2.1 SB1.2
ESPCamComPin: B20.2 J1.2 SB12.1
GND: C1.1 C2.1 C3.1 C4.1 C5.2 C10.2 C11.2 C12.1 CIMU1.1 CIMU.1 D1.C D2.C D3.C D4.C H1.3 H4.2 J1.4 J1b.7 J1b.MP1 J1b.MP2 J2.2 MH1.3 MH2.3 OP1.4 OP1.5 PP2.3 PWR.1 Q1.2 R6.1 R10.1 R16.1 SB17.3 U1.7 U2.1 U2.2 U2.3 U2.6 U2.7 U2.12 U3.3 U3.8 U3.12 U3.19 U4.1 U4.8 U4.10
"GPS R\e\s\e\t\": R23.1 U3.2
GPS_3V3: C12.2 Q2.3 R23.2 U3.1
GPS_EN: R24.2 SB13.1
GPS_UART_RX: SB9.2 U3.10
GPS_UART_TX: SB8.2 U3.9
I2C_SCL: U3.14
I2C_SDA: U3.15
IMU_SCL: B11.1 SB11.2 U2.13
IMU_SDA: B12.2 SB10.2 U2.14
JTAG_TEST/SBW_TCK: J1b.6 PP2.4 U1.4
LED1: R2.1 U1.28
LED2: R3.1 U1.29
LED3: R4.1 U1.30
LightSense: 50k.1 H4.1 SB14.2
"LoRa Antenna": U4.9
"LoRa C\S\": R21.1 SB18.1
"LoRa DIO1": U1.10 U4.15
"LoRa IRQ": SB15.1 U4.14
"LoRa R\e\s\e\t\": R22.1 SB16.1 U4.6
LORA_MISO: SB7.1 U4.2
LORA_MOSI: SB6.1 U4.3
LORA_SCK: SB5.1 U4.4
"Manual Buzzer Control": R17.1 SB19.2
MotorShutterPWM: MH1.2 U1.21
MotorWindPWM: MH2.2 U1.22
Net1_1: 1.1 C10.1 C11.1 U4.13
NetB11_2: B11.2 R7.1
NetB12_1: B12.1 R8.1
NetB17_2: B17.2 R12.2
NetB19_1: B19.1 J1.1
NetD1_A: D1.A R2.2
NetD2_A: D2.A R3.2
NetD3_A: D3.A R4.2
NetD4_A: D4.A R25.1
NetD5_A: D5.A LS1.N Q1.3
NetJ1_6: J1.6 J3.1
NetJ1_7: J1.7 J3.2
NetJ1_8: J1.8 J3.3
NetJ2_1: J2.1 S1.3
NetOP1_1: OP1.1 R13.2 SB4.2
NetOP1_2: OP1.2 R13.1 R14.2
NetOP1_3: OP1.3 R15.2 R16.2
NetOP1_6: OP1.6 OP1.7
NetQ1_1: Q1.1 R10.2 R17.2
NetQ2_1: Q2.1 R24.1 R26.2
NetR9_2: R9.2 R11.2 SB1.1 SB3.2
NetR14_1: R14.1 SB3.1
NetR15_1: R15.1 SB2.1
NetR25_2: R25.2 U3.5
NetR26_1: R26.1 SB17.1
NetSB12_2: SB12.2 U1.11
NetSB13_2: SB13.2 U1.27
NetSB14_1: SB14.1 U1.41
NetSB15_2: SB15.2 U1.9
NetSB16_2: SB16.2 U1.8
NetSB18_2: SB18.2 U4.5
NetSB19_1: SB19.1 U1.42
NetSB20_1: SB20.1 U1.40
NetT1_1: T1.1 U4.16
NetT2_1: T2.1 U4.11
NetT3_1: T3.1 U4.12
NetT4_1: T4.1 U4.7
NetT5_1: T5.1 U1.20
NetT6_1: T6.1 U1.19
NetT7_1: T7.1 U1.18
NetT8_1: T8.1 U1.17
Reset/SBW_TDIO: C5.1 J1b.8 PP2.1 R1.1 U1.5
UCA0_CLK/JTAG_TMS: J1b.4 U1.33
UCA0_RX/MISO/JTAG_TDI: J1b.2 U1.32
UCA0_STE/JTAG_TCK: J1b.5 U1.34
UCA0_TX/MOSI/JTAG_TDO: B20.1 J1b.1 U1.31
UCA1_RX/MISO: SB8.1 U1.24
UCA1_TX/MOSI: SB9.1 U1.23
UCB0_CLK: SB5.2 U1.2
UCB0_SCL/MISO: SB7.2 U1.48
UCB0_SDA/MOSI: SB6.2 U1.1
UCB1_MISO/SCL: SB11.1 U1.12
UCB1_MOSI/SDA: SB10.1 U1.13
Vbat: H1.5 R5.2
Vbat/2: C3.2 R5.1 R6.2 U1.43
pads on no net: J1.3 J1.5 J2.3 J2.4 J2.5 J2.6 J2.7 J2.8 LS1.1 LS1.2 S1.1 U1.3 U1.14 U1.15 U1.16 U1.25 U1.26 U1.35 U1.36 U1.37 U1.38 U1.39 U2.4 U2.9 U2.10 U2.11 U3. U3.4 U3.6 U3.7 U3.11 U3.13 U3.16 U3.17 U3.18 U3.20
copper on no net: | length 3.3
  Top Layer w0.3: 9.962,36.134 9.962,36.982 10.216,37.236 11.237,37.236 11.262,37.211 11.262,36.134

## Polygon pours and split planes (outlines as drawn)
GND on GND (split plane): 54.49,0.51 0.51,0.51 0.51,74.49 54.49,74.49
3V3 on 3V (split plane): 54.49,0.51 0.51,0.51 0.51,74.49 54.49,74.49

## Text inside footprints (layer, text, board x,y; h text height)
LS1: Top Overlay "-" at 19.558,3.429 h0.75; Top Overlay "+" at 19.558,9.779 h0.75; Mechanical 13 "+" at 19.558,9.779 h0.75; Mechanical 13 "-" at 19.558,3.429 h0.75
U4: Top Overlay "*" at 48.494,27.798 h0.75 r270